# Altium PCB board.PcbDoc (part 3 of 3)
Units mil, origin at the board's own origin, x right, y up, seen from the top; angles counter-clockwise.
Board outline 2246 x 2100 mil, 2 copper layers (Top Layer, Bottom Layer); 47 components, 39 nets, 150 pads, 7 vias.
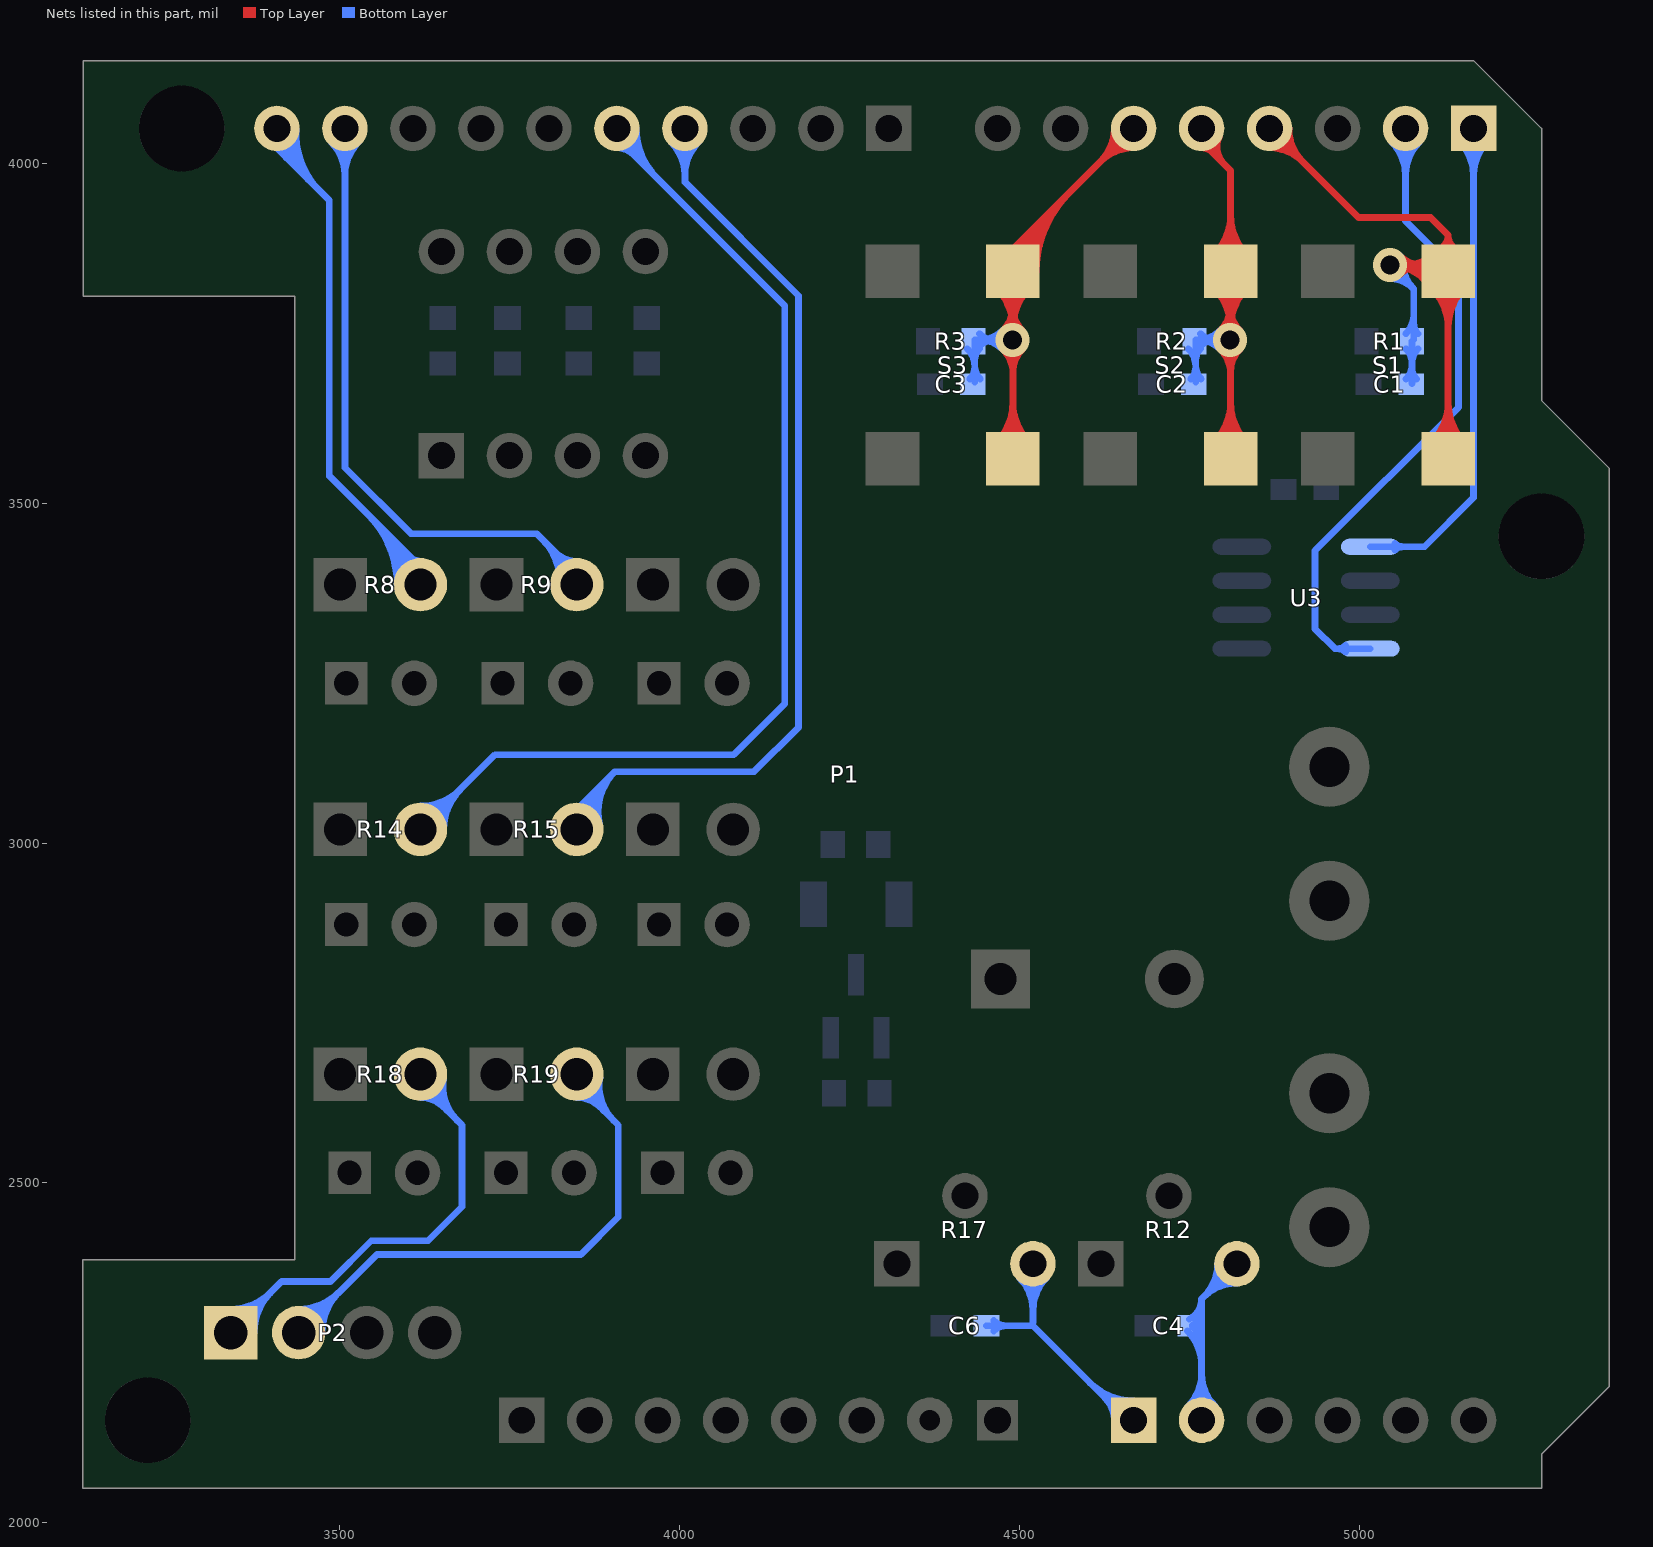
[diagram p3: the nets of this part, all layers, seen from the top]

## Via types
v1: diameter 50, hole 28, Top Layer to Bottom Layer, 7 vias

## Nets (pads, with @x,y where several pads share a name; then routed paths per layer and width w, separated by ;. In a path a pad name is that pad's centre, name@x,y a point inside that pad or via, vN(x,y) a via of type N, cw(c..) or ccw(c..) an arc to the next point about the centre after c; other vN are vias at no path point) (continued)
POTEN1: C6.2 P1.9 R17.3 | length 2419.6
  Bottom Layer w10: C6.2@4451.5,2290 4520,2290 4659,2151 P1.9@4668,2151 ; 4520,2295 R17.3@4520,2381.18 ; C6.2@4462.34,2282.4 cw(c4480.69,2264.05) 4480.69,2290 ; C6.2@4462.34,2282.4 cw(c4480.69,2264.05) 4480.69,2290 ; C6.2@4462.34,2282.4 cw(c4480.69,2264.05) 4480.69,2290 ; C6.2@4462.34,2282.4 cw(c4480.69,2264.05) 4480.69,2290 ; C6.2@4462.34,2282.4 cw(c4480.69,2264.05) 4480.69,2290 ; C6.2@4462.34,2297.6 ccw(c4480.69,2315.95) 4480.69,2290 ; C6.2@4462.34,2297.6 ccw(c4480.69,2315.95) 4480.69,2290 ; C6.2@4462.34,2297.6 ccw(c4480.69,2315.95) 4480.69,2290 ; C6.2@4462.34,2297.6 ccw(c4480.69,2315.95) 4480.69,2290 ; C6.2@4462.34,2297.6 ccw(c4480.69,2315.95) 4480.69,2290 ; R17.3@4499.87,2361.05 cw(c4451.28,2312.46) 4520,2312.46 ; R17.3@4499.87,2361.05 cw(c4451.28,2312.46) 4520,2312.46 ; R17.3@4499.87,2361.05 cw(c4451.28,2312.46) 4520,2312.46 ; R17.3@4499.87,2361.05 cw(c4451.28,2312.46) 4520,2312.46 ; R17.3@4499.87,2361.05 cw(c4451.28,2312.46) 4520,2312.46 ; R17.3@4506.94,2368.12 cw(c4475.42,2336.6) 4520,2336.6 ; R17.3@4506.94,2368.12 cw(c4475.42,2336.6) 4520,2336.6 ; R17.3@4506.94,2368.12 cw(c4475.42,2336.6) 4520,2336.6 ; R17.3@4506.94,2368.12 cw(c4475.42,2336.6) 4520,2336.6 ; R17.3@4506.94,2368.12 cw(c4475.42,2336.6) 4520,2336.6 ; 4520,2312.46 cw(c4588.72,2312.46) R17.3@4540.13,2361.05 ; 4520,2312.46 cw(c4588.72,2312.46) R17.3@4540.13,2361.05 ; 4520,2312.46 cw(c4588.72,2312.46) R17.3@4540.13,2361.05 ; 4520,2312.46 cw(c4588.72,2312.46) R17.3@4540.13,2361.05 ; 4520,2312.46 cw(c4588.72,2312.46) R17.3@4540.13,2361.05 ; 4520,2336.6 cw(c4564.58,2336.6) R17.3@4533.06,2368.12 ; 4520,2336.6 cw(c4564.58,2336.6) R17.3@4533.06,2368.12 ; 4520,2336.6 cw(c4564.58,2336.6) R17.3@4533.06,2368.12 ; 4520,2336.6 cw(c4564.58,2336.6) R17.3@4533.06,2368.12 ; 4520,2336.6 cw(c4564.58,2336.6) R17.3@4533.06,2368.12 ; 4604.04,2205.96 ccw(c4668,2269.91) P1.9@4668,2179.46 ; 4604.04,2205.96 ccw(c4668,2269.91) P1.9@4668,2179.46 ; 4604.04,2205.96 ccw(c4668,2269.91) P1.9@4668,2179.46 ; 4604.04,2205.96 ccw(c4668,2269.91) P1.9@4668,2179.46 ; 4604.04,2205.96 ccw(c4668,2269.91) P1.9@4668,2179.46 ; 4621.12,2188.88 ccw(c4668,2235.77) P1.9@4668,2169.46 ; 4621.12,2188.88 ccw(c4668,2235.77) P1.9@4668,2169.46 ; 4621.12,2188.88 ccw(c4668,2235.77) P1.9@4668,2169.46 ; 4621.12,2188.88 ccw(c4668,2235.77) P1.9@4668,2169.46 ; 4621.12,2188.88 ccw(c4668,2235.77) P1.9@4668,2169.46 ; 4625.77,2184.23 cw(c4592.54,2151) P1.9@4639.54,2151 ; 4625.77,2184.23 cw(c4592.54,2151) P1.9@4639.54,2151 ; 4625.77,2184.23 cw(c4592.54,2151) P1.9@4639.54,2151 ; 4625.77,2184.23 cw(c4592.54,2151) P1.9@4639.54,2151 ; 4625.77,2184.23 cw(c4592.54,2151) P1.9@4639.54,2151 ; P1.9@4638.19,2171.81 ccw(c4668,2201.63) P1.9@4668,2159.46 ; P1.9@4638.19,2171.81 ccw(c4668,2201.63) P1.9@4668,2159.46 ; P1.9@4638.19,2171.81 ccw(c4668,2201.63) P1.9@4668,2159.46 ; P1.9@4638.19,2171.81 ccw(c4668,2201.63) P1.9@4668,2159.46 ; P1.9@4638.19,2171.81 ccw(c4668,2201.63) P1.9@4668,2159.46
POTEN2: C4.2 P1.10 R12.3 | length 2905.4
  Bottom Layer w10: P1.10@4768,2151 4768,2329.18 ; R12.3@4820,2381.18 4768,2329.18 ; C4.2@4747.14,2282.4 cw(c4696.79,2232.05) 4768,2232.05 ; C4.2@4747.14,2282.4 cw(c4696.79,2232.05) 4768,2232.05 ; C4.2@4747.14,2282.4 cw(c4696.79,2232.05) 4768,2232.05 ; C4.2@4747.14,2282.4 cw(c4696.79,2232.05) 4768,2232.05 ; C4.2@4747.14,2282.4 cw(c4696.79,2232.05) 4768,2232.05 ; P1.10@4747.87,2171.13 ccw(c4699.28,2219.72) 4768,2219.72 ; P1.10@4747.87,2171.13 ccw(c4699.28,2219.72) 4768,2219.72 ; P1.10@4747.87,2171.13 ccw(c4699.28,2219.72) 4768,2219.72 ; P1.10@4747.87,2171.13 ccw(c4699.28,2219.72) 4768,2219.72 ; P1.10@4747.87,2171.13 ccw(c4699.28,2219.72) 4768,2219.72 ; C4.2@4749.86,2299.58 ccw(c4734.77,2329.18) 4768,2329.18 ; C4.2@4749.86,2299.58 ccw(c4734.77,2329.18) 4768,2329.18 ; C4.2@4749.86,2299.58 ccw(c4734.77,2329.18) 4768,2329.18 ; C4.2@4749.86,2299.58 ccw(c4734.77,2329.18) 4768,2329.18 ; C4.2@4749.86,2299.58 ccw(c4734.77,2329.18) 4768,2329.18 ; C4.2@4754.22,2289.47 cw(c4720.94,2256.19) 4768,2256.19 ; C4.2@4754.22,2289.47 cw(c4720.94,2256.19) 4768,2256.19 ; C4.2@4754.22,2289.47 cw(c4720.94,2256.19) 4768,2256.19 ; C4.2@4754.22,2289.47 cw(c4720.94,2256.19) 4768,2256.19 ; C4.2@4754.22,2289.47 cw(c4720.94,2256.19) 4768,2256.19 ; C4.2@4754.4,2290.67 ccw(c4743.09,2312.86) 4768,2312.86 ; C4.2@4754.4,2290.67 ccw(c4743.09,2312.86) 4768,2312.86 ; C4.2@4754.4,2290.67 ccw(c4743.09,2312.86) 4768,2312.86 ; C4.2@4754.4,2290.67 ccw(c4743.09,2312.86) 4768,2312.86 ; C4.2@4754.4,2290.67 ccw(c4743.09,2312.86) 4768,2312.86 ; P1.10@4754.94,2164.06 ccw(c4723.42,2195.58) 4768,2195.58 ; P1.10@4754.94,2164.06 ccw(c4723.42,2195.58) 4768,2195.58 ; P1.10@4754.94,2164.06 ccw(c4723.42,2195.58) 4768,2195.58 ; P1.10@4754.94,2164.06 ccw(c4723.42,2195.58) 4768,2195.58 ; P1.10@4754.94,2164.06 ccw(c4723.42,2195.58) 4768,2195.58 ; C4.2@4761.29,2296.54 cw(c4745.08,2280.33) C4.2@4768,2280.33 ; C4.2@4761.29,2296.54 cw(c4745.08,2280.33) C4.2@4768,2280.33 ; C4.2@4761.29,2296.54 cw(c4745.08,2280.33) C4.2@4768,2280.33 ; C4.2@4761.29,2296.54 cw(c4745.08,2280.33) C4.2@4768,2280.33 ; C4.2@4761.29,2296.54 cw(c4745.08,2280.33) C4.2@4768,2280.33 ; 4768,2195.58 ccw(c4812.58,2195.58) P1.10@4781.06,2164.06 ; 4768,2195.58 ccw(c4812.58,2195.58) P1.10@4781.06,2164.06 ; 4768,2195.58 ccw(c4812.58,2195.58) P1.10@4781.06,2164.06 ; 4768,2195.58 ccw(c4812.58,2195.58) P1.10@4781.06,2164.06 ; 4768,2195.58 ccw(c4812.58,2195.58) P1.10@4781.06,2164.06 ; 4768,2219.72 ccw(c4836.72,2219.72) P1.10@4788.13,2171.13 ; 4768,2219.72 ccw(c4836.72,2219.72) P1.10@4788.13,2171.13 ; 4768,2219.72 ccw(c4836.72,2219.72) P1.10@4788.13,2171.13 ; 4768,2219.72 ccw(c4836.72,2219.72) P1.10@4788.13,2171.13 ; 4768,2219.72 ccw(c4836.72,2219.72) P1.10@4788.13,2171.13 ; 4771.41,2332.59 cw(c4820,2284) R12.3@4820,2352.72 ; 4771.41,2332.59 ccw(c4722.82,2381.18) R12.3@4791.54,2381.18 ; 4771.41,2332.59 cw(c4820,2284) R12.3@4820,2352.72 ; 4771.41,2332.59 ccw(c4722.82,2381.18) R12.3@4791.54,2381.18 ; 4771.41,2332.59 ccw(c4722.82,2381.18) R12.3@4791.54,2381.18 ; 4771.41,2332.59 cw(c4820,2284) R12.3@4820,2352.72 ; 4771.41,2332.59 ccw(c4722.82,2381.18) R12.3@4791.54,2381.18 ; 4771.41,2332.59 cw(c4820,2284) R12.3@4820,2352.72 ; 4771.41,2332.59 ccw(c4722.82,2381.18) R12.3@4791.54,2381.18 ; 4771.41,2332.59 cw(c4820,2284) R12.3@4820,2352.72 ; 4788.48,2349.66 cw(c4820,2318.14) R12.3@4820,2362.72 ; 4788.48,2349.66 ccw(c4756.96,2381.18) R12.3@4801.54,2381.18 ; 4788.48,2349.66 cw(c4820,2318.14) R12.3@4820,2362.72 ; 4788.48,2349.66 ccw(c4756.96,2381.18) R12.3@4801.54,2381.18 ; 4788.48,2349.66 ccw(c4756.96,2381.18) R12.3@4801.54,2381.18 ; 4788.48,2349.66 cw(c4820,2318.14) R12.3@4820,2362.72 ; 4788.48,2349.66 ccw(c4756.96,2381.18) R12.3@4801.54,2381.18 ; 4788.48,2349.66 cw(c4820,2318.14) R12.3@4820,2362.72 ; 4788.48,2349.66 ccw(c4756.96,2381.18) R12.3@4801.54,2381.18 ; 4788.48,2349.66 cw(c4820,2318.14) R12.3@4820,2362.72
RED1: P1.32 R8.2 | length 4035.9
  Bottom Layer w10: P1.32@3408,4051 3408,4022 3485,3945 3485,3540 3619.06,3405.94 R8.2@3619.06,3380 ; P1.32@3406.47,4051.09 ccw(c3464.28,4047.63) 3423.33,4006.67 ; P1.32@3406.47,4051.09 ccw(c3464.28,4047.63) 3423.33,4006.67 ; P1.32@3406.47,4051.09 ccw(c3464.28,4047.63) 3423.33,4006.67 ; P1.32@3406.47,4051.09 ccw(c3464.28,4047.63) 3423.33,4006.67 ; P1.32@3406.47,4051.09 ccw(c3464.28,4047.63) 3423.33,4006.67 ; P1.32@3416.45,4050.49 ccw(c3493.95,4045.85) 3439.05,3990.95 ; P1.32@3416.45,4050.49 ccw(c3493.95,4045.85) 3439.05,3990.95 ; P1.32@3416.45,4050.49 ccw(c3493.95,4045.85) 3439.05,3990.95 ; P1.32@3416.45,4050.49 ccw(c3493.95,4045.85) 3439.05,3990.95 ; P1.32@3416.45,4050.49 ccw(c3493.95,4045.85) 3439.05,3990.95 ; P1.32@3426.43,4049.9 ccw(c3523.62,4044.07) 3454.77,3975.23 ; P1.32@3426.43,4049.9 ccw(c3523.62,4044.07) 3454.77,3975.23 ; P1.32@3426.43,4049.9 ccw(c3523.62,4044.07) 3454.77,3975.23 ; P1.32@3426.43,4049.9 ccw(c3523.62,4044.07) 3454.77,3975.23 ; P1.32@3426.43,4049.9 ccw(c3523.62,4044.07) 3454.77,3975.23 ; P1.32@3436.41,4049.3 ccw(c3553.28,4042.29) 3470.5,3959.5 ; P1.32@3436.41,4049.3 ccw(c3553.28,4042.29) 3470.5,3959.5 ; P1.32@3436.41,4049.3 ccw(c3553.28,4042.29) 3470.5,3959.5 ; P1.32@3436.41,4049.3 ccw(c3553.28,4042.29) 3470.5,3959.5 ; P1.32@3436.41,4049.3 ccw(c3553.28,4042.29) 3470.5,3959.5 ; 3542.04,3482.96 cw(c3439.07,3380) R8.2@3584.68,3380 ; 3542.04,3482.96 cw(c3439.07,3380) R8.2@3584.68,3380 ; 3542.04,3482.96 cw(c3439.07,3380) R8.2@3584.68,3380 ; 3542.04,3482.96 cw(c3439.07,3380) R8.2@3584.68,3380 ; 3542.04,3482.96 cw(c3439.07,3380) R8.2@3584.68,3380 ; 3559.11,3465.89 cw(c3473.21,3380) R8.2@3594.68,3380 ; 3559.11,3465.89 cw(c3473.21,3380) R8.2@3594.68,3380 ; 3559.11,3465.89 cw(c3473.21,3380) R8.2@3594.68,3380 ; 3559.11,3465.89 cw(c3473.21,3380) R8.2@3594.68,3380 ; 3559.11,3465.89 cw(c3473.21,3380) R8.2@3594.68,3380 ; 3576.18,3448.82 cw(c3507.36,3380) R8.2@3604.69,3380 ; 3576.18,3448.82 cw(c3507.36,3380) R8.2@3604.69,3380 ; 3576.18,3448.82 cw(c3507.36,3380) R8.2@3604.69,3380 ; 3576.18,3448.82 cw(c3507.36,3380) R8.2@3604.69,3380 ; 3576.18,3448.82 cw(c3507.36,3380) R8.2@3604.69,3380 ; 3593.25,3431.75 cw(c3541.5,3380) R8.2@3614.68,3380 ; 3593.25,3431.75 cw(c3541.5,3380) R8.2@3614.68,3380 ; 3593.25,3431.75 cw(c3541.5,3380) R8.2@3614.68,3380 ; 3593.25,3431.75 cw(c3541.5,3380) R8.2@3614.68,3380 ; 3593.25,3431.75 cw(c3541.5,3380) R8.2@3614.68,3380 ; 3604.67,3420.33 ccw(c3619.06,3434.71) R8.2@3619.06,3414.37 ; 3604.67,3420.33 ccw(c3619.06,3434.71) R8.2@3619.06,3414.37 ; 3604.67,3420.33 ccw(c3619.06,3434.71) R8.2@3619.06,3414.37 ; 3604.67,3420.33 ccw(c3619.06,3434.71) R8.2@3619.06,3414.37 ; 3604.67,3420.33 ccw(c3619.06,3434.71) R8.2@3619.06,3414.37
RED2: P1.27 R14.2 | length 3735.1
  Bottom Layer w10: R14.2@3619.06,3020 3729.06,3130 4080,3130 4155,3205 4155,3790 3908,4037 P1.27@3908,4051 ; R14.2@3619.06,3044.37 ccw(c3619.06,3103.2) 3660.66,3061.6 ; R14.2@3619.06,3044.37 ccw(c3619.06,3103.2) 3660.66,3061.6 ; R14.2@3619.06,3044.37 ccw(c3619.06,3103.2) 3660.66,3061.6 ; R14.2@3619.06,3044.37 ccw(c3619.06,3103.2) 3660.66,3061.6 ; R14.2@3619.06,3044.37 ccw(c3619.06,3103.2) 3660.66,3061.6 ; R14.2@3619.06,3054.37 ccw(c3619.06,3137.35) 3677.73,3078.67 ; R14.2@3619.06,3054.37 ccw(c3619.06,3137.35) 3677.73,3078.67 ; R14.2@3619.06,3054.37 ccw(c3619.06,3137.35) 3677.73,3078.67 ; R14.2@3619.06,3054.37 ccw(c3619.06,3137.35) 3677.73,3078.67 ; R14.2@3619.06,3054.37 ccw(c3619.06,3137.35) 3677.73,3078.67 ; R14.2@3643.43,3020 cw(c3702.26,3020) 3660.66,3061.6 ; R14.2@3643.43,3020 cw(c3702.26,3020) 3660.66,3061.6 ; R14.2@3643.43,3020 cw(c3702.26,3020) 3660.66,3061.6 ; R14.2@3643.43,3020 cw(c3702.26,3020) 3660.66,3061.6 ; R14.2@3643.43,3020 cw(c3702.26,3020) 3660.66,3061.6 ; R14.2@3653.43,3020 cw(c3736.4,3020) 3677.73,3078.67 ; R14.2@3653.43,3020 cw(c3736.4,3020) 3677.73,3078.67 ; R14.2@3653.43,3020 cw(c3736.4,3020) 3677.73,3078.67 ; R14.2@3653.43,3020 cw(c3736.4,3020) 3677.73,3078.67 ; R14.2@3653.43,3020 cw(c3736.4,3020) 3677.73,3078.67 ; P1.27@3908,4022.54 cw(c3908,3987.62) 3932.69,4012.31 ; P1.27@3908,4022.54 cw(c3908,3987.62) 3932.69,4012.31 ; P1.27@3908,4022.54 cw(c3908,3987.62) 3932.69,4012.31 ; P1.27@3908,4022.54 cw(c3908,3987.62) 3932.69,4012.31 ; P1.27@3908,4022.54 cw(c3908,3987.62) 3932.69,4012.31 ; P1.27@3916.46,4051 ccw(c3970.7,4051) 3932.35,4012.65 ; P1.27@3916.46,4051 ccw(c3970.7,4051) 3932.35,4012.65 ; P1.27@3916.46,4051 ccw(c3970.7,4051) 3932.35,4012.65 ; P1.27@3916.46,4051 ccw(c3970.7,4051) 3932.35,4012.65 ; P1.27@3916.46,4051 ccw(c3970.7,4051) 3932.35,4012.65 ; P1.27@3926.46,4051 ccw(c4004.84,4051) 3949.42,3995.58 ; P1.27@3926.46,4051 ccw(c4004.84,4051) 3949.42,3995.58 ; P1.27@3926.46,4051 ccw(c4004.84,4051) 3949.42,3995.58 ; P1.27@3926.46,4051 ccw(c4004.84,4051) 3949.42,3995.58 ; P1.27@3926.46,4051 ccw(c4004.84,4051) 3949.42,3995.58 ; P1.27@3936.46,4051 ccw(c4038.98,4051) 3966.49,3978.51 ; P1.27@3936.46,4051 ccw(c4038.98,4051) 3966.49,3978.51 ; P1.27@3936.46,4051 ccw(c4038.98,4051) 3966.49,3978.51 ; P1.27@3936.46,4051 ccw(c4038.98,4051) 3966.49,3978.51 ; P1.27@3936.46,4051 ccw(c4038.98,4051) 3966.49,3978.51
RED3: P2.1 R18.2 | length 2765.1
  Bottom Layer w10: P2.1@3340,2280 3415,2355 3486.72,2355 3546.72,2415 3630,2415 3680,2465 3680,2585 3619.06,2645.94 R18.2@3619.06,2660 ; P2.1@3340,2304.37 ccw(c3340,2363.2) 3381.6,2321.6 ; P2.1@3340,2304.37 ccw(c3340,2363.2) 3381.6,2321.6 ; P2.1@3340,2304.37 ccw(c3340,2363.2) 3381.6,2321.6 ; P2.1@3340,2304.37 ccw(c3340,2363.2) 3381.6,2321.6 ; P2.1@3340,2304.37 ccw(c3340,2363.2) 3381.6,2321.6 ; P2.1@3340,2314.37 ccw(c3340,2397.35) 3398.67,2338.67 ; P2.1@3340,2314.37 ccw(c3340,2397.35) 3398.67,2338.67 ; P2.1@3340,2314.37 ccw(c3340,2397.35) 3398.67,2338.67 ; P2.1@3340,2314.37 ccw(c3340,2397.35) 3398.67,2338.67 ; P2.1@3340,2314.37 ccw(c3340,2397.35) 3398.67,2338.67 ; P2.1@3364.37,2280 cw(c3423.2,2280) 3381.6,2321.6 ; P2.1@3364.37,2280 cw(c3423.2,2280) 3381.6,2321.6 ; P2.1@3364.37,2280 cw(c3423.2,2280) 3381.6,2321.6 ; P2.1@3364.37,2280 cw(c3423.2,2280) 3381.6,2321.6 ; P2.1@3364.37,2280 cw(c3423.2,2280) 3381.6,2321.6 ; P2.1@3374.37,2280 cw(c3457.35,2280) 3398.67,2338.67 ; P2.1@3374.37,2280 cw(c3457.35,2280) 3398.67,2338.67 ; P2.1@3374.37,2280 cw(c3457.35,2280) 3398.67,2338.67 ; P2.1@3374.37,2280 cw(c3457.35,2280) 3398.67,2338.67 ; P2.1@3374.37,2280 cw(c3457.35,2280) 3398.67,2338.67 ; R18.2@3619.06,2625.63 cw(c3619.06,2576.59) 3653.73,2611.27 ; R18.2@3619.06,2625.63 cw(c3619.06,2576.59) 3653.73,2611.27 ; R18.2@3619.06,2625.63 cw(c3619.06,2576.59) 3653.73,2611.27 ; R18.2@3619.06,2625.63 cw(c3619.06,2576.59) 3653.73,2611.27 ; R18.2@3619.06,2625.63 cw(c3619.06,2576.59) 3653.73,2611.27 ; R18.2@3633.23,2657.65 ccw(c3676.41,2650.49) 3645.46,2619.54 ; R18.2@3633.23,2657.65 ccw(c3676.41,2650.49) 3645.46,2619.54 ; R18.2@3633.23,2657.65 ccw(c3676.41,2650.49) 3645.46,2619.54 ; R18.2@3633.23,2657.65 ccw(c3676.41,2650.49) 3645.46,2619.54 ; R18.2@3633.23,2657.65 ccw(c3676.41,2650.49) 3645.46,2619.54 ; R18.2@3643.1,2656.01 ccw(c3700.01,2646.58) 3659.22,2605.78 ; R18.2@3643.1,2656.01 ccw(c3700.01,2646.58) 3659.22,2605.78 ; R18.2@3643.1,2656.01 ccw(c3700.01,2646.58) 3659.22,2605.78 ; R18.2@3643.1,2656.01 ccw(c3700.01,2646.58) 3659.22,2605.78 ; R18.2@3643.1,2656.01 ccw(c3700.01,2646.58) 3659.22,2605.78 ; R18.2@3652.96,2654.38 ccw(c3723.6,2642.66) 3672.97,2592.03 ; R18.2@3652.96,2654.38 ccw(c3723.6,2642.66) 3672.97,2592.03 ; R18.2@3652.96,2654.38 ccw(c3723.6,2642.66) 3672.97,2592.03 ; R18.2@3652.96,2654.38 ccw(c3723.6,2642.66) 3672.97,2592.03 ; R18.2@3652.96,2654.38 ccw(c3723.6,2642.66) 3672.97,2592.03
RX_485: P1.16 U3.4 | length 1967.8
  Bottom Layer w10: U3.4@5016.19,3285.81 4964.19,3285.81 4935,3315 4935,3430 5145.86,3640.86 5145.86,3837.14 5068,3915 P1.16@5068,4051 ; 4968.25,3285.81 cw(c4968.25,3269.37) U3.4@4979.88,3281 ; 4968.25,3285.81 ccw(c4968.25,3302.26) U3.4@4979.88,3290.63 ; 4968.25,3285.81 cw(c4968.25,3269.37) U3.4@4979.88,3281 ; 4968.25,3285.81 ccw(c4968.25,3302.26) U3.4@4979.88,3290.63 ; 4968.25,3285.81 ccw(c4968.25,3302.26) U3.4@4979.88,3290.63 ; 4968.25,3285.81 cw(c4968.25,3269.37) U3.4@4979.88,3281 ; 4968.25,3285.81 ccw(c4968.25,3302.26) U3.4@4979.88,3290.63 ; 4968.25,3285.81 cw(c4968.25,3269.37) U3.4@4979.88,3281 ; 4968.25,3285.81 ccw(c4968.25,3302.26) U3.4@4979.88,3290.63 ; 4968.25,3285.81 cw(c4968.25,3269.37) U3.4@4979.88,3281 ; P1.16@5047.87,4030.87 cw(c4999.28,3982.28) 5068,3982.28 ; P1.16@5047.87,4030.87 cw(c4999.28,3982.28) 5068,3982.28 ; P1.16@5047.87,4030.87 cw(c4999.28,3982.28) 5068,3982.28 ; P1.16@5047.87,4030.87 cw(c4999.28,3982.28) 5068,3982.28 ; P1.16@5047.87,4030.87 cw(c4999.28,3982.28) 5068,3982.28 ; P1.16@5054.94,4037.94 cw(c5023.42,4006.42) 5068,4006.42 ; P1.16@5054.94,4037.94 cw(c5023.42,4006.42) 5068,4006.42 ; P1.16@5054.94,4037.94 cw(c5023.42,4006.42) 5068,4006.42 ; P1.16@5054.94,4037.94 cw(c5023.42,4006.42) 5068,4006.42 ; P1.16@5054.94,4037.94 cw(c5023.42,4006.42) 5068,4006.42 ; 5068,3982.28 cw(c5136.72,3982.28) P1.16@5088.13,4030.87 ; 5068,3982.28 cw(c5136.72,3982.28) P1.16@5088.13,4030.87 ; 5068,3982.28 cw(c5136.72,3982.28) P1.16@5088.13,4030.87 ; 5068,3982.28 cw(c5136.72,3982.28) P1.16@5088.13,4030.87 ; 5068,3982.28 cw(c5136.72,3982.28) P1.16@5088.13,4030.87 ; 5068,4006.42 cw(c5112.58,4006.42) P1.16@5081.06,4037.94 ; 5068,4006.42 cw(c5112.58,4006.42) P1.16@5081.06,4037.94 ; 5068,4006.42 cw(c5112.58,4006.42) P1.16@5081.06,4037.94 ; 5068,4006.42 cw(c5112.58,4006.42) P1.16@5081.06,4037.94 ; 5068,4006.42 cw(c5112.58,4006.42) P1.16@5081.06,4037.94
SW1: C1.2 P1.18 R1.2 S1.3 S1.4 | length 2234.8
  Top Layer w10: P1.18@4868,4022.54 cw(c4868,3953.82) 4916.59,4002.41 cw(c4965.18,4051) P1.18@4896.46,4051 ; P1.18@4868,4032.54 cw(c4868,3987.96) 4899.52,4019.48 cw(c4931.04,4051) P1.18@4886.46,4051 ; P1.18@4868,4051 4999,3920 5105,3920 5130.58,3894.42 ; v1@5059.14,3835.86 cw(c5093.28,3801.72) 5093.28,3850 cw(c5093.28,3898.28) v1@5059.14,3864.14 ; v1@5064.64,3850 cw(c5064.64,3792.83) S1.4@5110.87,3826.46 ; v1@5069.83,3850 ccw(c5069.83,3901.55) S1.4@5106.28,3865.1 ; 5084.28,3850 cw(c5084.28,3807.12) S1.4@5118.96,3832.34 ; S1.4@5102.79,3820.58 ccw(c5045,3778.55) v1(5045,3850) S1.4@5121.38,3850 ; S1.3@5106.28,3589.51 ccw(c5047.61,3648.18) 5130.58,3648.18 ccw(c5213.56,3648.18) S1.3@5154.89,3589.51 ; S1.4@5106.28,3816.49 cw(c5047.61,3757.82) 5130.58,3757.82 cw(c5213.56,3757.82) S1.4@5154.89,3816.49 ; S1.3@5113.35,3582.44 ccw(c5071.75,3624.04) 5130.58,3624.04 ccw(c5189.42,3624.04) S1.3@5147.81,3582.44 ; S1.4@5113.35,3823.56 cw(c5071.75,3781.96) 5130.58,3781.96 cw(c5189.42,3781.96) S1.4@5147.81,3823.56 ; S1.3@5130.58,3565.2 S1.4@5130.58,3840.8 5130.58,3894.42 ; 5130.58,3894.42 cw(c5105.94,3894.42) 5116.23,3872.03 ccw(c5105.94,3894.42) 5130.58,3894.42 ; 5130.58,3894.42 ccw(c5155.22,3894.42) 5144.93,3872.03 cw(c5155.22,3894.42) 5130.58,3894.42
  Bottom Layer w10: v1@5045,3830 cw(c5045,3781.72) 5079.14,3815.86 cw(c5113.28,3850) v1@5065,3850 ; v1(5045,3850) 5080,3815 R1.2@5080,3740.54 ; R1.2@5068.47,3748.96 ccw(c5040.64,3776.79) 5080,3776.79 ; C1.2@5077.46,3675.97 R1.2@5077.46,3738 ; 5080,3764.55 ccw(c5102.04,3764.55) R1.2@5086.46,3748.96 ; 5077.46,3705.33 cw(c5108.16,3705.33) 5086.46,3727.04 ccw(c5108.16,3705.33) 5077.46,3705.33 ; 5077.46,3705.33 ccw(c5046.76,3705.33) 5068.47,3727.04 cw(c5046.76,3705.33) 5077.46,3705.33 ; C1.2@5068.9,3682.6 ccw(c5048.21,3703.28) 5077.46,3703.28 cw(c5048.21,3703.28) C1.2@5068.9,3682.6 ; 5077.46,3698.61 ccw(c5100.11,3698.61) 5084.1,3682.6 cw(c5100.11,3698.61) 5077.46,3698.61
SW2: C2.2 P1.19 R2.2 S2.3 S2.4 | length 6631
  Top Layer w10: P1.19@4768,4051 4768,4032 4810.58,3989.42 S2.4@4810.58,3840.8 S2.3@4810.58,3565.2 ; P1.19@4768,4022.54 cw(c4768,3999.69) 4784.16,4015.84 ; P1.19@4768,4022.54 cw(c4768,3999.69) 4784.16,4015.84 ; P1.19@4768,4022.54 cw(c4768,3999.69) 4784.16,4015.84 ; P1.19@4768,4022.54 cw(c4768,3999.69) 4784.16,4015.84 ; P1.19@4768,4022.54 cw(c4768,3999.69) 4784.16,4015.84 ; P1.19@4775.69,4047.47 ccw(c4798.51,4036.99) 4780.76,4019.24 ; P1.19@4775.69,4047.47 ccw(c4798.51,4036.99) 4780.76,4019.24 ; P1.19@4775.69,4047.47 ccw(c4798.51,4036.99) 4780.76,4019.24 ; P1.19@4775.69,4047.47 ccw(c4798.51,4036.99) 4780.76,4019.24 ; P1.19@4775.69,4047.47 ccw(c4798.51,4036.99) 4780.76,4019.24 ; P1.19@4784.78,4043.3 ccw(c4812.44,4030.6) 4790.92,4009.08 ; P1.19@4784.78,4043.3 ccw(c4812.44,4030.6) 4790.92,4009.08 ; P1.19@4784.78,4043.3 ccw(c4812.44,4030.6) 4790.92,4009.08 ; P1.19@4784.78,4043.3 ccw(c4812.44,4030.6) 4790.92,4009.08 ; P1.19@4784.78,4043.3 ccw(c4812.44,4030.6) 4790.92,4009.08 ; S2.3@4786.28,3589.51 ccw(c4727.61,3648.18) 4810.58,3648.18 ; S2.3@4786.28,3589.51 ccw(c4727.61,3648.18) 4810.58,3648.18 ; S2.3@4786.28,3589.51 ccw(c4727.61,3648.18) 4810.58,3648.18 ; S2.3@4786.28,3589.51 ccw(c4727.61,3648.18) 4810.58,3648.18 ; S2.3@4786.28,3589.51 ccw(c4727.61,3648.18) 4810.58,3648.18 ; S2.4@4786.28,3816.49 cw(c4727.61,3757.82) v1@4810.58,3757.82 ; S2.4@4786.28,3816.49 cw(c4727.61,3757.82) v1@4810.58,3757.82 ; S2.4@4786.28,3816.49 cw(c4727.61,3757.82) v1@4810.58,3757.82 ; S2.4@4786.28,3816.49 cw(c4727.61,3757.82) v1@4810.58,3757.82 ; S2.4@4786.28,3816.49 cw(c4727.61,3757.82) v1@4810.58,3757.82 ; S2.4@4786.28,3865.1 ccw(c4727.61,3923.77) 4810.58,3923.77 ; S2.4@4786.28,3865.1 ccw(c4727.61,3923.77) 4810.58,3923.77 ; S2.4@4786.28,3865.1 ccw(c4727.61,3923.77) 4810.58,3923.77 ; S2.4@4786.28,3865.1 ccw(c4727.61,3923.77) 4810.58,3923.77 ; S2.4@4786.28,3865.1 ccw(c4727.61,3923.77) 4810.58,3923.77 ; S2.3@4793.35,3582.44 ccw(c4751.75,3624.04) 4810.58,3624.04 ; S2.3@4793.35,3582.44 ccw(c4751.75,3624.04) 4810.58,3624.04 ; S2.3@4793.35,3582.44 ccw(c4751.75,3624.04) 4810.58,3624.04 ; S2.3@4793.35,3582.44 ccw(c4751.75,3624.04) 4810.58,3624.04 ; S2.3@4793.35,3582.44 ccw(c4751.75,3624.04) 4810.58,3624.04 ; S2.4@4793.35,3823.56 cw(c4751.75,3781.96) 4810.58,3781.96 ; S2.4@4793.35,3823.56 cw(c4751.75,3781.96) 4810.58,3781.96 ; S2.4@4793.35,3823.56 cw(c4751.75,3781.96) 4810.58,3781.96 ; S2.4@4793.35,3823.56 cw(c4751.75,3781.96) 4810.58,3781.96 ; S2.4@4793.35,3823.56 cw(c4751.75,3781.96) 4810.58,3781.96 ; S2.4@4793.35,3858.03 ccw(c4751.75,3899.63) 4810.58,3899.63 ; S2.4@4793.35,3858.03 ccw(c4751.75,3899.63) 4810.58,3899.63 ; S2.4@4793.35,3858.03 ccw(c4751.75,3899.63) 4810.58,3899.63 ; S2.4@4793.35,3858.03 ccw(c4751.75,3899.63) 4810.58,3899.63 ; S2.4@4793.35,3858.03 ccw(c4751.75,3899.63) 4810.58,3899.63 ; P1.19@4793.87,4039.12 ccw(c4826.37,4024.2) 4801.08,3998.92 ; P1.19@4793.87,4039.12 ccw(c4826.37,4024.2) 4801.08,3998.92 ; P1.19@4793.87,4039.12 ccw(c4826.37,4024.2) 4801.08,3998.92 ; P1.19@4793.87,4039.12 ccw(c4826.37,4024.2) 4801.08,3998.92 ; P1.19@4793.87,4039.12 ccw(c4826.37,4024.2) 4801.08,3998.92 ; v1@4795.86,3725.86 cw(c4760.31,3690.31) 4810.58,3690.31 ; v1@4795.86,3725.86 cw(c4760.31,3690.31) 4810.58,3690.31 ; v1@4795.86,3725.86 cw(c4760.31,3690.31) 4810.58,3690.31 ; v1@4795.86,3725.86 cw(c4760.31,3690.31) 4810.58,3690.31 ; v1@4795.86,3725.86 cw(c4760.31,3690.31) 4810.58,3690.31 ; v1@4795.86,3754.14 ccw(c4760.31,3789.69) 4810.58,3789.69 ; v1@4795.86,3754.14 ccw(c4760.31,3789.69) 4810.58,3789.69 ; v1@4795.86,3754.14 ccw(c4760.31,3789.69) 4810.58,3789.69 ; v1@4795.86,3754.14 ccw(c4760.31,3789.69) 4810.58,3789.69 ; v1@4795.86,3754.14 ccw(c4760.31,3789.69) 4810.58,3789.69 ; v1@4802.93,3732.93 cw(c4784.45,3714.45) 4810.58,3714.45 ; v1@4802.93,3732.93 cw(c4784.45,3714.45) 4810.58,3714.45 ; v1@4802.93,3732.93 cw(c4784.45,3714.45) 4810.58,3714.45 ; v1@4802.93,3732.93 cw(c4784.45,3714.45) 4810.58,3714.45 ; v1@4802.93,3732.93 cw(c4784.45,3714.45) 4810.58,3714.45 ; v1@4802.93,3747.07 ccw(c4784.45,3765.55) 4810.58,3765.55 ; v1@4802.93,3747.07 ccw(c4784.45,3765.55) 4810.58,3765.55 ; v1@4802.93,3747.07 ccw(c4784.45,3765.55) 4810.58,3765.55 ; v1@4802.93,3747.07 ccw(c4784.45,3765.55) 4810.58,3765.55 ; v1@4802.93,3747.07 ccw(c4784.45,3765.55) 4810.58,3765.55 ; 4810.58,3624.04 ccw(c4869.42,3624.04) S2.3@4827.81,3582.44 ; 4810.58,3624.04 ccw(c4869.42,3624.04) S2.3@4827.81,3582.44 ; 4810.58,3624.04 ccw(c4869.42,3624.04) S2.3@4827.81,3582.44 ; 4810.58,3624.04 ccw(c4869.42,3624.04) S2.3@4827.81,3582.44 ; 4810.58,3624.04 ccw(c4869.42,3624.04) S2.3@4827.81,3582.44 ; 4810.58,3648.18 ccw(c4893.56,3648.18) S2.3@4834.89,3589.51 ; 4810.58,3648.18 ccw(c4893.56,3648.18) S2.3@4834.89,3589.51 ; 4810.58,3648.18 ccw(c4893.56,3648.18) S2.3@4834.89,3589.51 ; 4810.58,3648.18 ccw(c4893.56,3648.18) S2.3@4834.89,3589.51 ; 4810.58,3648.18 ccw(c4893.56,3648.18) S2.3@4834.89,3589.51 ; 4810.58,3693.12 cw(c4856.88,3693.12) v1@4824.14,3725.86 ; 4810.58,3693.12 cw(c4856.88,3693.12) v1@4824.14,3725.86 ; 4810.58,3693.12 cw(c4856.88,3693.12) v1@4824.14,3725.86 ; 4810.58,3693.12 cw(c4856.88,3693.12) v1@4824.14,3725.86 ; 4810.58,3693.12 cw(c4856.88,3693.12) v1@4824.14,3725.86 ; v1@4810.58,3757.82 cw(c4893.56,3757.82) S2.4@4834.89,3816.49 ; v1@4810.58,3757.82 cw(c4893.56,3757.82) S2.4@4834.89,3816.49 ; v1@4810.58,3757.82 cw(c4893.56,3757.82) S2.4@4834.89,3816.49 ; v1@4810.58,3757.82 cw(c4893.56,3757.82) S2.4@4834.89,3816.49 ; v1@4810.58,3757.82 cw(c4893.56,3757.82) S2.4@4834.89,3816.49 ; 4810.58,3781.96 cw(c4869.42,3781.96) S2.4@4827.81,3823.56 ; 4810.58,3781.96 cw(c4869.42,3781.96) S2.4@4827.81,3823.56 ; 4810.58,3781.96 cw(c4869.42,3781.96) S2.4@4827.81,3823.56 ; 4810.58,3781.96 cw(c4869.42,3781.96) S2.4@4827.81,3823.56 ; 4810.58,3781.96 cw(c4869.42,3781.96) S2.4@4827.81,3823.56 ; 4810.58,3786.88 ccw(c4856.88,3786.88) v1@4824.14,3754.14 ; 4810.58,3786.88 ccw(c4856.88,3786.88) v1@4824.14,3754.14 ; 4810.58,3786.88 ccw(c4856.88,3786.88) v1@4824.14,3754.14 ; 4810.58,3786.88 ccw(c4856.88,3786.88) v1@4824.14,3754.14 ; 4810.58,3786.88 ccw(c4856.88,3786.88) v1@4824.14,3754.14 ; 4810.58,3899.63 ccw(c4869.42,3899.63) S2.4@4827.81,3858.03 ; 4810.58,3899.63 ccw(c4869.42,3899.63) S2.4@4827.81,3858.03 ; 4810.58,3899.63 ccw(c4869.42,3899.63) S2.4@4827.81,3858.03 ; 4810.58,3899.63 ccw(c4869.42,3899.63) S2.4@4827.81,3858.03 ; 4810.58,3899.63 ccw(c4869.42,3899.63) S2.4@4827.81,3858.03 ; 4810.58,3923.77 ccw(c4893.56,3923.77) S2.4@4834.89,3865.1 ; 4810.58,3923.77 ccw(c4893.56,3923.77) S2.4@4834.89,3865.1 ; 4810.58,3923.77 ccw(c4893.56,3923.77) S2.4@4834.89,3865.1 ; 4810.58,3923.77 ccw(c4893.56,3923.77) S2.4@4834.89,3865.1 ; 4810.58,3923.77 ccw(c4893.56,3923.77) S2.4@4834.89,3865.1
  Bottom Layer w10: C2.2@4759.46,3677.97 4759.46,3740 v1(4810,3740) ; R2.2@4748.47,3727.04 cw(c4721.94,3700.5) 4759.46,3700.5 ; R2.2@4748.47,3727.04 cw(c4721.94,3700.5) 4759.46,3700.5 ; R2.2@4748.47,3727.04 cw(c4721.94,3700.5) 4759.46,3700.5 ; R2.2@4748.47,3727.04 cw(c4721.94,3700.5) 4759.46,3700.5 ; R2.2@4748.47,3727.04 cw(c4721.94,3700.5) 4759.46,3700.5 ; C2.2@4752.14,3682.6 ccw(c4734.47,3700.27) 4759.46,3700.27 ; C2.2@4752.14,3682.6 ccw(c4734.47,3700.27) 4759.46,3700.27 ; C2.2@4752.14,3682.6 ccw(c4734.47,3700.27) 4759.46,3700.27 ; C2.2@4752.14,3682.6 ccw(c4734.47,3700.27) 4759.46,3700.27 ; C2.2@4752.14,3682.6 ccw(c4734.47,3700.27) 4759.46,3700.27 ; 4759.46,3701.62 ccw(c4786.37,3701.62) C2.2@4767.34,3682.6 ; 4759.46,3701.62 ccw(c4786.37,3701.62) C2.2@4767.34,3682.6 ; 4759.46,3701.62 ccw(c4786.37,3701.62) C2.2@4767.34,3682.6 ; 4759.46,3701.62 ccw(c4786.37,3701.62) C2.2@4767.34,3682.6 ; 4759.46,3701.62 ccw(c4786.37,3701.62) C2.2@4767.34,3682.6 ; 4759.46,3710.16 cw(c4783.34,3710.16) R2.2@4766.46,3727.04 ; 4759.46,3710.16 cw(c4783.34,3710.16) R2.2@4766.46,3727.04 ; 4759.46,3710.16 cw(c4783.34,3710.16) R2.2@4766.46,3727.04 ; 4759.46,3710.16 cw(c4783.34,3710.16) R2.2@4766.46,3727.04 ; 4759.46,3710.16 cw(c4783.34,3710.16) R2.2@4766.46,3727.04 ; R2.2@4761.72,3740 cw(c4761.72,3691.72) v1@4795.86,3725.86 ; R2.2@4761.72,3740 ccw(c4761.72,3788.28) v1@4795.86,3754.14 ; R2.2@4761.72,3740 cw(c4761.72,3691.72) v1@4795.86,3725.86 ; R2.2@4761.72,3740 ccw(c4761.72,3788.28) v1@4795.86,3754.14 ; R2.2@4761.72,3740 ccw(c4761.72,3788.28) v1@4795.86,3754.14 ; R2.2@4761.72,3740 cw(c4761.72,3691.72) v1@4795.86,3725.86 ; R2.2@4761.72,3740 ccw(c4761.72,3788.28) v1@4795.86,3754.14 ; R2.2@4761.72,3740 cw(c4761.72,3691.72) v1@4795.86,3725.86 ; R2.2@4761.72,3740 ccw(c4761.72,3788.28) v1@4795.86,3754.14 ; R2.2@4761.72,3740 cw(c4761.72,3691.72) v1@4795.86,3725.86 ; R2.2@4766.46,3730.98 cw(c4788.24,3709.19) v1@4788.24,3740 ; R2.2@4766.46,3730.98 cw(c4788.24,3709.19) v1@4788.24,3740 ; R2.2@4766.46,3730.98 cw(c4788.24,3709.19) v1@4788.24,3740 ; R2.2@4766.46,3730.98 cw(c4788.24,3709.19) v1@4788.24,3740 ; R2.2@4766.46,3730.98 cw(c4788.24,3709.19) v1@4788.24,3740 ; R2.2@4766.46,3748.96 ccw(c4788.09,3770.59) v1@4788.09,3740 ; R2.2@4766.46,3748.96 ccw(c4788.09,3770.59) v1@4788.09,3740 ; R2.2@4766.46,3748.96 ccw(c4788.09,3770.59) v1@4788.09,3740 ; R2.2@4766.46,3748.96 ccw(c4788.09,3770.59) v1@4788.09,3740 ; R2.2@4766.46,3748.96 ccw(c4788.09,3770.59) v1@4788.09,3740
SW3: C3.2 P1.20 R3.2 S3.3 S3.4 | length 8058.6
  Top Layer w10: S3.3@4490.58,3565.2 S3.4@4490.58,3840.8 4490.58,3873.58 P1.20@4668,4051 ; S3.3@4466.28,3589.51 ccw(c4407.61,3648.18) 4490.58,3648.18 ; S3.3@4466.28,3589.51 ccw(c4407.61,3648.18) 4490.58,3648.18 ; S3.3@4466.28,3589.51 ccw(c4407.61,3648.18) 4490.58,3648.18 ; S3.3@4466.28,3589.51 ccw(c4407.61,3648.18) 4490.58,3648.18 ; S3.3@4466.28,3589.51 ccw(c4407.61,3648.18) 4490.58,3648.18 ; S3.4@4466.28,3816.49 cw(c4407.61,3757.82) v1@4490.58,3757.82 ; S3.4@4466.28,3816.49 cw(c4407.61,3757.82) v1@4490.58,3757.82 ; S3.4@4466.28,3816.49 cw(c4407.61,3757.82) v1@4490.58,3757.82 ; S3.4@4466.28,3816.49 cw(c4407.61,3757.82) v1@4490.58,3757.82 ; S3.4@4466.28,3816.49 cw(c4407.61,3757.82) v1@4490.58,3757.82 ; S3.3@4473.35,3582.44 ccw(c4431.75,3624.04) 4490.58,3624.04 ; S3.3@4473.35,3582.44 ccw(c4431.75,3624.04) 4490.58,3624.04 ; S3.3@4473.35,3582.44 ccw(c4431.75,3624.04) 4490.58,3624.04 ; S3.3@4473.35,3582.44 ccw(c4431.75,3624.04) 4490.58,3624.04 ; S3.3@4473.35,3582.44 ccw(c4431.75,3624.04) 4490.58,3624.04 ; S3.4@4473.35,3823.56 cw(c4431.75,3781.96) 4490.58,3781.96 ; S3.4@4473.35,3823.56 cw(c4431.75,3781.96) 4490.58,3781.96 ; S3.4@4473.35,3823.56 cw(c4431.75,3781.96) 4490.58,3781.96 ; S3.4@4473.35,3823.56 cw(c4431.75,3781.96) 4490.58,3781.96 ; S3.4@4473.35,3823.56 cw(c4431.75,3781.96) 4490.58,3781.96 ; v1@4475.86,3725.86 cw(c4440.31,3690.31) 4490.58,3690.31 ; v1@4475.86,3725.86 cw(c4440.31,3690.31) 4490.58,3690.31 ; v1@4475.86,3725.86 cw(c4440.31,3690.31) 4490.58,3690.31 ; v1@4475.86,3725.86 cw(c4440.31,3690.31) 4490.58,3690.31 ; v1@4475.86,3725.86 cw(c4440.31,3690.31) 4490.58,3690.31 ; v1@4475.86,3754.14 ccw(c4440.31,3789.69) 4490.58,3789.69 ; v1@4475.86,3754.14 ccw(c4440.31,3789.69) 4490.58,3789.69 ; v1@4475.86,3754.14 ccw(c4440.31,3789.69) 4490.58,3789.69 ; v1@4475.86,3754.14 ccw(c4440.31,3789.69) 4490.58,3789.69 ; v1@4475.86,3754.14 ccw(c4440.31,3789.69) 4490.58,3789.69 ; v1@4482.93,3732.93 cw(c4464.45,3714.45) 4490.58,3714.45 ; v1@4482.93,3732.93 cw(c4464.45,3714.45) 4490.58,3714.45 ; v1@4482.93,3732.93 cw(c4464.45,3714.45) 4490.58,3714.45 ; v1@4482.93,3732.93 cw(c4464.45,3714.45) 4490.58,3714.45 ; v1@4482.93,3732.93 cw(c4464.45,3714.45) 4490.58,3714.45 ; v1@4482.93,3747.07 ccw(c4464.45,3765.55) 4490.58,3765.55 ; v1@4482.93,3747.07 ccw(c4464.45,3765.55) 4490.58,3765.55 ; v1@4482.93,3747.07 ccw(c4464.45,3765.55) 4490.58,3765.55 ; v1@4482.93,3747.07 ccw(c4464.45,3765.55) 4490.58,3765.55 ; v1@4482.93,3747.07 ccw(c4464.45,3765.55) 4490.58,3765.55 ; S3.4@4484.95,3840.8 cw(c4550.52,3840.8) 4504.16,3887.16 ; S3.4@4484.95,3840.8 cw(c4550.52,3840.8) 4504.16,3887.16 ; S3.4@4484.95,3840.8 cw(c4550.52,3840.8) 4504.16,3887.16 ; S3.4@4484.95,3840.8 cw(c4550.52,3840.8) 4504.16,3887.16 ; S3.4@4484.95,3840.8 cw(c4550.52,3840.8) 4504.16,3887.16 ; 4490.58,3624.04 ccw(c4549.42,3624.04) S3.3@4507.81,3582.44 ; 4490.58,3624.04 ccw(c4549.42,3624.04) S3.3@4507.81,3582.44 ; 4490.58,3624.04 ccw(c4549.42,3624.04) S3.3@4507.81,3582.44 ; 4490.58,3624.04 ccw(c4549.42,3624.04) S3.3@4507.81,3582.44 ; 4490.58,3624.04 ccw(c4549.42,3624.04) S3.3@4507.81,3582.44 ; 4490.58,3648.18 ccw(c4573.56,3648.18) S3.3@4514.89,3589.51 ; 4490.58,3648.18 ccw(c4573.56,3648.18) S3.3@4514.89,3589.51 ; 4490.58,3648.18 ccw(c4573.56,3648.18) S3.3@4514.89,3589.51 ; 4490.58,3648.18 ccw(c4573.56,3648.18) S3.3@4514.89,3589.51 ; 4490.58,3648.18 ccw(c4573.56,3648.18) S3.3@4514.89,3589.51 ; 4490.58,3693.12 cw(c4536.88,3693.12) v1@4504.14,3725.86 ; 4490.58,3693.12 cw(c4536.88,3693.12) v1@4504.14,3725.86 ; 4490.58,3693.12 cw(c4536.88,3693.12) v1@4504.14,3725.86 ; 4490.58,3693.12 cw(c4536.88,3693.12) v1@4504.14,3725.86 ; 4490.58,3693.12 cw(c4536.88,3693.12) v1@4504.14,3725.86 ; v1@4490.58,3757.82 cw(c4573.56,3757.82) S3.4@4514.89,3816.49 ; v1@4490.58,3757.82 cw(c4573.56,3757.82) S3.4@4514.89,3816.49 ; v1@4490.58,3757.82 cw(c4573.56,3757.82) S3.4@4514.89,3816.49 ; v1@4490.58,3757.82 cw(c4573.56,3757.82) S3.4@4514.89,3816.49 ; v1@4490.58,3757.82 cw(c4573.56,3757.82) S3.4@4514.89,3816.49 ; 4490.58,3781.96 cw(c4549.42,3781.96) S3.4@4507.81,3823.56 ; 4490.58,3781.96 cw(c4549.42,3781.96) S3.4@4507.81,3823.56 ; 4490.58,3781.96 cw(c4549.42,3781.96) S3.4@4507.81,3823.56 ; 4490.58,3781.96 cw(c4549.42,3781.96) S3.4@4507.81,3823.56 ; 4490.58,3781.96 cw(c4549.42,3781.96) S3.4@4507.81,3823.56 ; 4490.58,3786.88 ccw(c4536.88,3786.88) v1@4504.14,3754.14 ; 4490.58,3786.88 ccw(c4536.88,3786.88) v1@4504.14,3754.14 ; 4490.58,3786.88 ccw(c4536.88,3786.88) v1@4504.14,3754.14 ; 4490.58,3786.88 ccw(c4536.88,3786.88) v1@4504.14,3754.14 ; 4490.58,3786.88 ccw(c4536.88,3786.88) v1@4504.14,3754.14 ; S3.4@4494.95,3840.8 cw(c4584.66,3840.8) 4521.23,3904.23 ; S3.4@4494.95,3840.8 cw(c4584.66,3840.8) 4521.23,3904.23 ; S3.4@4494.95,3840.8 cw(c4584.66,3840.8) 4521.23,3904.23 ; S3.4@4494.95,3840.8 cw(c4584.66,3840.8) 4521.23,3904.23 ; S3.4@4494.95,3840.8 cw(c4584.66,3840.8) 4521.23,3904.23 ; S3.4@4504.95,3840.8 cw(c4618.8,3840.8) 4538.3,3921.3 ; S3.4@4504.95,3840.8 cw(c4618.8,3840.8) 4538.3,3921.3 ; S3.4@4504.95,3840.8 cw(c4618.8,3840.8) 4538.3,3921.3 ; S3.4@4504.95,3840.8 cw(c4618.8,3840.8) 4538.3,3921.3 ; S3.4@4504.95,3840.8 cw(c4618.8,3840.8) 4538.3,3921.3 ; S3.4@4514.95,3840.8 cw(c4652.94,3840.8) 4555.37,3938.37 ; S3.4@4514.95,3840.8 cw(c4652.94,3840.8) 4555.37,3938.37 ; S3.4@4514.95,3840.8 cw(c4652.94,3840.8) 4555.37,3938.37 ; S3.4@4514.95,3840.8 cw(c4652.94,3840.8) 4555.37,3938.37 ; S3.4@4514.95,3840.8 cw(c4652.94,3840.8) 4555.37,3938.37 ; S3.4@4524.95,3840.8 cw(c4687.09,3840.8) 4572.44,3955.44 ; S3.4@4524.95,3840.8 cw(c4687.09,3840.8) 4572.44,3955.44 ; S3.4@4524.95,3840.8 cw(c4687.09,3840.8) 4572.44,3955.44 ; S3.4@4524.95,3840.8 cw(c4687.09,3840.8) 4572.44,3955.44 ; S3.4@4524.95,3840.8 cw(c4687.09,3840.8) 4572.44,3955.44 ; 4619.41,4002.41 cw(c4668,3953.82) P1.20@4668,4022.54 ; 4619.41,4002.41 ccw(c4570.82,4051) P1.20@4639.54,4051 ; 4619.41,4002.41 cw(c4668,3953.82) P1.20@4668,4022.54 ; 4619.41,4002.41 ccw(c4570.82,4051) P1.20@4639.54,4051 ; 4619.41,4002.41 ccw(c4570.82,4051) P1.20@4639.54,4051 ; 4619.41,4002.41 cw(c4668,3953.82) P1.20@4668,4022.54 ; 4619.41,4002.41 ccw(c4570.82,4051) P1.20@4639.54,4051 ; 4619.41,4002.41 cw(c4668,3953.82) P1.20@4668,4022.54 ; 4619.41,4002.41 ccw(c4570.82,4051) P1.20@4639.54,4051 ; 4619.41,4002.41 cw(c4668,3953.82) P1.20@4668,4022.54 ; 4636.48,4019.48 cw(c4668,3987.96) P1.20@4668,4032.54 ; 4636.48,4019.48 ccw(c4604.96,4051) P1.20@4649.54,4051 ; 4636.48,4019.48 cw(c4668,3987.96) P1.20@4668,4032.54 ; 4636.48,4019.48 ccw(c4604.96,4051) P1.20@4649.54,4051 ; 4636.48,4019.48 ccw(c4604.96,4051) P1.20@4649.54,4051 ; 4636.48,4019.48 cw(c4668,3987.96) P1.20@4668,4032.54 ; 4636.48,4019.48 ccw(c4604.96,4051) P1.20@4649.54,4051 ; 4636.48,4019.48 cw(c4668,3987.96) P1.20@4668,4032.54 ; 4636.48,4019.48 ccw(c4604.96,4051) P1.20@4649.54,4051 ; 4636.48,4019.48 cw(c4668,3987.96) P1.20@4668,4032.54
  Bottom Layer w10: C3.2@4434.46,3677.97 4434.46,3740 v1(4490,3740) ; R3.2@4423.47,3727.04 cw(c4396.94,3700.5) 4434.46,3700.5 ; R3.2@4423.47,3727.04 cw(c4396.94,3700.5) 4434.46,3700.5 ; R3.2@4423.47,3727.04 cw(c4396.94,3700.5) 4434.46,3700.5 ; R3.2@4423.47,3727.04 cw(c4396.94,3700.5) 4434.46,3700.5 ; R3.2@4423.47,3727.04 cw(c4396.94,3700.5) 4434.46,3700.5 ; C3.2@4427.14,3682.6 ccw(c4409.47,3700.27) 4434.46,3700.27 ; C3.2@4427.14,3682.6 ccw(c4409.47,3700.27) 4434.46,3700.27 ; C3.2@4427.14,3682.6 ccw(c4409.47,3700.27) 4434.46,3700.27 ; C3.2@4427.14,3682.6 ccw(c4409.47,3700.27) 4434.46,3700.27 ; C3.2@4427.14,3682.6 ccw(c4409.47,3700.27) 4434.46,3700.27 ; 4434.46,3701.62 ccw(c4461.37,3701.62) C3.2@4442.34,3682.6 ; 4434.46,3701.62 ccw(c4461.37,3701.62) C3.2@4442.34,3682.6 ; 4434.46,3701.62 ccw(c4461.37,3701.62) C3.2@4442.34,3682.6 ; 4434.46,3701.62 ccw(c4461.37,3701.62) C3.2@4442.34,3682.6 ; 4434.46,3701.62 ccw(c4461.37,3701.62) C3.2@4442.34,3682.6 ; 4434.46,3710.16 cw(c4458.34,3710.16) R3.2@4441.46,3727.04 ; 4434.46,3710.16 cw(c4458.34,3710.16) R3.2@4441.46,3727.04 ; 4434.46,3710.16 cw(c4458.34,3710.16) R3.2@4441.46,3727.04 ; 4434.46,3710.16 cw(c4458.34,3710.16) R3.2@4441.46,3727.04 ; 4434.46,3710.16 cw(c4458.34,3710.16) R3.2@4441.46,3727.04 ; R3.2@4441.46,3730.98 cw(c4463.24,3709.19) 4463.24,3740 ; R3.2@4441.46,3730.98 cw(c4463.24,3709.19) 4463.24,3740 ; R3.2@4441.46,3730.98 cw(c4463.24,3709.19) 4463.24,3740 ; R3.2@4441.46,3730.98 cw(c4463.24,3709.19) 4463.24,3740 ; R3.2@4441.46,3730.98 cw(c4463.24,3709.19) 4463.24,3740 ; R3.2@4441.46,3748.96 ccw(c4463.09,3770.59) 4463.09,3740 ; R3.2@4441.46,3748.96 ccw(c4463.09,3770.59) 4463.09,3740 ; R3.2@4441.46,3748.96 ccw(c4463.09,3770.59) 4463.09,3740 ; R3.2@4441.46,3748.96 ccw(c4463.09,3770.59) 4463.09,3740 ; R3.2@4441.46,3748.96 ccw(c4463.09,3770.59) 4463.09,3740 ; R3.2@4441.72,3740 cw(c4441.72,3691.72) v1@4475.86,3725.86 ; R3.2@4441.72,3740 ccw(c4441.72,3788.28) v1@4475.86,3754.14 ; R3.2@4441.72,3740 cw(c4441.72,3691.72) v1@4475.86,3725.86 ; R3.2@4441.72,3740 ccw(c4441.72,3788.28) v1@4475.86,3754.14 ; R3.2@4441.72,3740 ccw(c4441.72,3788.28) v1@4475.86,3754.14 ; R3.2@4441.72,3740 cw(c4441.72,3691.72) v1@4475.86,3725.86 ; R3.2@4441.72,3740 ccw(c4441.72,3788.28) v1@4475.86,3754.14 ; R3.2@4441.72,3740 cw(c4441.72,3691.72) v1@4475.86,3725.86 ; R3.2@4441.72,3740 ccw(c4441.72,3788.28) v1@4475.86,3754.14 ; R3.2@4441.72,3740 cw(c4441.72,3691.72) v1@4475.86,3725.86
TX_485: P1.15 U3.1 | length 1743.7
  Bottom Layer w10: U3.1@5016.19,3435.81 5095.81,3435.81 5168,3508 P1.15@5168,4051 ; U3.1@5052.51,3431 cw(c5064.13,3419.37) 5064.13,3435.81 ; U3.1@5052.51,3431 cw(c5064.13,3419.37) 5064.13,3435.81 ; U3.1@5052.51,3431 cw(c5064.13,3419.37) 5064.13,3435.81 ; U3.1@5052.51,3431 cw(c5064.13,3419.37) 5064.13,3435.81 ; U3.1@5052.51,3431 cw(c5064.13,3419.37) 5064.13,3435.81 ; U3.1@5052.51,3440.63 ccw(c5064.13,3452.26) 5064.13,3435.81 ; U3.1@5052.51,3440.63 ccw(c5064.13,3452.26) 5064.13,3435.81 ; U3.1@5052.51,3440.63 ccw(c5064.13,3452.26) 5064.13,3435.81 ; U3.1@5052.51,3440.63 ccw(c5064.13,3452.26) 5064.13,3435.81 ; U3.1@5052.51,3440.63 ccw(c5064.13,3452.26) 5064.13,3435.81 ; P1.15@5147.87,4030.87 cw(c5099.28,3982.28) 5168,3982.28 ; P1.15@5147.87,4030.87 cw(c5099.28,3982.28) 5168,3982.28 ; P1.15@5147.87,4030.87 cw(c5099.28,3982.28) 5168,3982.28 ; P1.15@5147.87,4030.87 cw(c5099.28,3982.28) 5168,3982.28 ; P1.15@5147.87,4030.87 cw(c5099.28,3982.28) 5168,3982.28 ; P1.15@5154.94,4037.94 cw(c5123.42,4006.42) 5168,4006.42 ; P1.15@5154.94,4037.94 cw(c5123.42,4006.42) 5168,4006.42 ; P1.15@5154.94,4037.94 cw(c5123.42,4006.42) 5168,4006.42 ; P1.15@5154.94,4037.94 cw(c5123.42,4006.42) 5168,4006.42 ; P1.15@5154.94,4037.94 cw(c5123.42,4006.42) 5168,4006.42 ; 5168,3982.28 cw(c5236.72,3982.28) P1.15@5188.13,4030.87 ; 5168,3982.28 cw(c5236.72,3982.28) P1.15@5188.13,4030.87 ; 5168,3982.28 cw(c5236.72,3982.28) P1.15@5188.13,4030.87 ; 5168,3982.28 cw(c5236.72,3982.28) P1.15@5188.13,4030.87 ; 5168,3982.28 cw(c5236.72,3982.28) P1.15@5188.13,4030.87 ; 5168,4006.42 cw(c5212.58,4006.42) P1.15@5181.06,4037.94 ; 5168,4006.42 cw(c5212.58,4006.42) P1.15@5181.06,4037.94 ; 5168,4006.42 cw(c5212.58,4006.42) P1.15@5181.06,4037.94 ; 5168,4006.42 cw(c5212.58,4006.42) P1.15@5181.06,4037.94 ; 5168,4006.42 cw(c5212.58,4006.42) P1.15@5181.06,4037.94
YELLOW1: P1.31 R9.2 | length 2617.2
  Bottom Layer w10: P1.31@3508,4051 3508,3552 3605,3455 3790,3455 3830.9,3414.1 R9.2@3830.9,3380 ; P1.31@3487.87,4030.87 cw(c3439.28,3982.28) 3508,3982.28 ; P1.31@3487.87,4030.87 cw(c3439.28,3982.28) 3508,3982.28 ; P1.31@3487.87,4030.87 cw(c3439.28,3982.28) 3508,3982.28 ; P1.31@3487.87,4030.87 cw(c3439.28,3982.28) 3508,3982.28 ; P1.31@3487.87,4030.87 cw(c3439.28,3982.28) 3508,3982.28 ; P1.31@3494.94,4037.94 cw(c3463.42,4006.42) 3508,4006.42 ; P1.31@3494.94,4037.94 cw(c3463.42,4006.42) 3508,4006.42 ; P1.31@3494.94,4037.94 cw(c3463.42,4006.42) 3508,4006.42 ; P1.31@3494.94,4037.94 cw(c3463.42,4006.42) 3508,4006.42 ; P1.31@3494.94,4037.94 cw(c3463.42,4006.42) 3508,4006.42 ; 3508,3982.28 cw(c3576.72,3982.28) P1.31@3528.13,4030.87 ; 3508,3982.28 cw(c3576.72,3982.28) P1.31@3528.13,4030.87 ; 3508,3982.28 cw(c3576.72,3982.28) P1.31@3528.13,4030.87 ; 3508,3982.28 cw(c3576.72,3982.28) P1.31@3528.13,4030.87 ; 3508,3982.28 cw(c3576.72,3982.28) P1.31@3528.13,4030.87 ; 3508,4006.42 cw(c3552.58,4006.42) P1.31@3521.06,4037.94 ; 3508,4006.42 cw(c3552.58,4006.42) P1.31@3521.06,4037.94 ; 3508,4006.42 cw(c3552.58,4006.42) P1.31@3521.06,4037.94 ; 3508,4006.42 cw(c3552.58,4006.42) P1.31@3521.06,4037.94 ; 3508,4006.42 cw(c3552.58,4006.42) P1.31@3521.06,4037.94 ; 3798.46,3446.54 cw(c3735.05,3383.13) R9.2@3824.69,3380.67 ; 3798.46,3446.54 cw(c3735.05,3383.13) R9.2@3824.69,3380.67 ; 3798.46,3446.54 cw(c3735.05,3383.13) R9.2@3824.69,3380.67 ; 3798.46,3446.54 cw(c3735.05,3383.13) R9.2@3824.69,3380.67 ; 3798.46,3446.54 cw(c3735.05,3383.13) R9.2@3824.69,3380.67 ; 3814.89,3430.11 cw(c3767.03,3382.25) R9.2@3834.69,3380.39 ; 3814.89,3430.11 cw(c3767.03,3382.25) R9.2@3834.69,3380.39 ; 3814.89,3430.11 cw(c3767.03,3382.25) R9.2@3834.69,3380.39 ; 3814.89,3430.11 cw(c3767.03,3382.25) R9.2@3834.69,3380.39 ; 3814.89,3430.11 cw(c3767.03,3382.25) R9.2@3834.69,3380.39 ; 3817.6,3427.4 ccw(c3849.06,3458.85) R9.2@3849.06,3414.37 ; 3817.6,3427.4 ccw(c3849.06,3458.85) R9.2@3849.06,3414.37 ; 3817.6,3427.4 ccw(c3849.06,3458.85) R9.2@3849.06,3414.37 ; 3817.6,3427.4 ccw(c3849.06,3458.85) R9.2@3849.06,3414.37 ; 3817.6,3427.4 ccw(c3849.06,3458.85) R9.2@3849.06,3414.37
YELLOW2: P1.26 R15.2 | length 3581.1
  Bottom Layer w10: R15.2@3849.06,3020 3849.06,3049.06 3905,3105 ; P1.26@4008,4051 4008,3972 4175,3805 4175,3170 4110,3105 3905,3105 ; R15.2@3853.32,3020.96 cw(c3901.23,3031.77) 3866.5,3066.5 ; R15.2@3853.32,3020.96 cw(c3901.23,3031.77) 3866.5,3066.5 ; R15.2@3853.32,3020.96 cw(c3901.23,3031.77) 3866.5,3066.5 ; R15.2@3853.32,3020.96 cw(c3901.23,3031.77) 3866.5,3066.5 ; R15.2@3853.32,3020.96 cw(c3901.23,3031.77) 3866.5,3066.5 ; R15.2@3863.07,3023.16 cw(c3922.17,3036.49) 3879.33,3079.33 ; R15.2@3863.07,3023.16 cw(c3922.17,3036.49) 3879.33,3079.33 ; R15.2@3863.07,3023.16 cw(c3922.17,3036.49) 3879.33,3079.33 ; R15.2@3863.07,3023.16 cw(c3922.17,3036.49) 3879.33,3079.33 ; R15.2@3863.07,3023.16 cw(c3922.17,3036.49) 3879.33,3079.33 ; R15.2@3872.83,3025.36 cw(c3943.11,3041.22) 3892.16,3092.16 ; R15.2@3872.83,3025.36 cw(c3943.11,3041.22) 3892.16,3092.16 ; R15.2@3872.83,3025.36 cw(c3943.11,3041.22) 3892.16,3092.16 ; R15.2@3872.83,3025.36 cw(c3943.11,3041.22) 3892.16,3092.16 ; R15.2@3872.83,3025.36 cw(c3943.11,3041.22) 3892.16,3092.16 ; R15.2@3882.58,3027.56 cw(c3964.05,3045.94) 3905,3105 ; R15.2@3882.58,3027.56 cw(c3964.05,3045.94) 3905,3105 ; R15.2@3882.58,3027.56 cw(c3964.05,3045.94) 3905,3105 ; R15.2@3882.58,3027.56 cw(c3964.05,3045.94) 3905,3105 ; R15.2@3882.58,3027.56 cw(c3964.05,3045.94) 3905,3105 ; P1.26@3987.87,4030.87 cw(c3939.28,3982.28) 4008,3982.28 ; P1.26@3987.87,4030.87 cw(c3939.28,3982.28) 4008,3982.28 ; P1.26@3987.87,4030.87 cw(c3939.28,3982.28) 4008,3982.28 ; P1.26@3987.87,4030.87 cw(c3939.28,3982.28) 4008,3982.28 ; P1.26@3987.87,4030.87 cw(c3939.28,3982.28) 4008,3982.28 ; P1.26@3994.94,4037.94 cw(c3963.42,4006.42) 4008,4006.42 ; P1.26@3994.94,4037.94 cw(c3963.42,4006.42) 4008,4006.42 ; P1.26@3994.94,4037.94 cw(c3963.42,4006.42) 4008,4006.42 ; P1.26@3994.94,4037.94 cw(c3963.42,4006.42) 4008,4006.42 ; P1.26@3994.94,4037.94 cw(c3963.42,4006.42) 4008,4006.42 ; 4008,3982.28 cw(c4076.72,3982.28) P1.26@4028.13,4030.87 ; 4008,3982.28 cw(c4076.72,3982.28) P1.26@4028.13,4030.87 ; 4008,3982.28 cw(c4076.72,3982.28) P1.26@4028.13,4030.87 ; 4008,3982.28 cw(c4076.72,3982.28) P1.26@4028.13,4030.87 ; 4008,3982.28 cw(c4076.72,3982.28) P1.26@4028.13,4030.87 ; 4008,4006.42 cw(c4052.58,4006.42) P1.26@4021.06,4037.94 ; 4008,4006.42 cw(c4052.58,4006.42) P1.26@4021.06,4037.94 ; 4008,4006.42 cw(c4052.58,4006.42) P1.26@4021.06,4037.94 ; 4008,4006.42 cw(c4052.58,4006.42) P1.26@4021.06,4037.94 ; 4008,4006.42 cw(c4052.58,4006.42) P1.26@4021.06,4037.94
YELLOW3: P2.2 R19.2 | length 2903.9
  Bottom Layer w10: P2.2@3440,2280 3555,2395 3855,2395 3910,2450 3910,2585 3849.06,2645.94 R19.2@3849.06,2660 ; P2.2@3440,2304.37 ccw(c3440,2363.2) 3481.6,2321.6 ; P2.2@3440,2304.37 ccw(c3440,2363.2) 3481.6,2321.6 ; P2.2@3440,2304.37 ccw(c3440,2363.2) 3481.6,2321.6 ; P2.2@3440,2304.37 ccw(c3440,2363.2) 3481.6,2321.6 ; P2.2@3440,2304.37 ccw(c3440,2363.2) 3481.6,2321.6 ; P2.2@3440,2314.37 ccw(c3440,2397.35) 3498.67,2338.67 ; P2.2@3440,2314.37 ccw(c3440,2397.35) 3498.67,2338.67 ; P2.2@3440,2314.37 ccw(c3440,2397.35) 3498.67,2338.67 ; P2.2@3440,2314.37 ccw(c3440,2397.35) 3498.67,2338.67 ; P2.2@3440,2314.37 ccw(c3440,2397.35) 3498.67,2338.67 ; P2.2@3464.37,2280 cw(c3523.2,2280) 3481.6,2321.6 ; P2.2@3464.37,2280 cw(c3523.2,2280) 3481.6,2321.6 ; P2.2@3464.37,2280 cw(c3523.2,2280) 3481.6,2321.6 ; P2.2@3464.37,2280 cw(c3523.2,2280) 3481.6,2321.6 ; P2.2@3464.37,2280 cw(c3523.2,2280) 3481.6,2321.6 ; P2.2@3474.37,2280 cw(c3557.35,2280) 3498.67,2338.67 ; P2.2@3474.37,2280 cw(c3557.35,2280) 3498.67,2338.67 ; P2.2@3474.37,2280 cw(c3557.35,2280) 3498.67,2338.67 ; P2.2@3474.37,2280 cw(c3557.35,2280) 3498.67,2338.67 ; P2.2@3474.37,2280 cw(c3557.35,2280) 3498.67,2338.67 ; R19.2@3849.06,2625.63 cw(c3849.06,2576.59) 3883.73,2611.27 ; R19.2@3849.06,2625.63 cw(c3849.06,2576.59) 3883.73,2611.27 ; R19.2@3849.06,2625.63 cw(c3849.06,2576.59) 3883.73,2611.27 ; R19.2@3849.06,2625.63 cw(c3849.06,2576.59) 3883.73,2611.27 ; R19.2@3849.06,2625.63 cw(c3849.06,2576.59) 3883.73,2611.27 ; R19.2@3863.23,2657.65 ccw(c3906.41,2650.49) 3875.46,2619.54 ; R19.2@3863.23,2657.65 ccw(c3906.41,2650.49) 3875.46,2619.54 ; R19.2@3863.23,2657.65 ccw(c3906.41,2650.49) 3875.46,2619.54 ; R19.2@3863.23,2657.65 ccw(c3906.41,2650.49) 3875.46,2619.54 ; R19.2@3863.23,2657.65 ccw(c3906.41,2650.49) 3875.46,2619.54 ; R19.2@3873.1,2656.01 ccw(c3930.01,2646.58) 3889.22,2605.78 ; R19.2@3873.1,2656.01 ccw(c3930.01,2646.58) 3889.22,2605.78 ; R19.2@3873.1,2656.01 ccw(c3930.01,2646.58) 3889.22,2605.78 ; R19.2@3873.1,2656.01 ccw(c3930.01,2646.58) 3889.22,2605.78 ; R19.2@3873.1,2656.01 ccw(c3930.01,2646.58) 3889.22,2605.78 ; R19.2@3882.96,2654.38 ccw(c3953.6,2642.66) 3902.97,2592.03 ; R19.2@3882.96,2654.38 ccw(c3953.6,2642.66) 3902.97,2592.03 ; R19.2@3882.96,2654.38 ccw(c3953.6,2642.66) 3902.97,2592.03 ; R19.2@3882.96,2654.38 ccw(c3953.6,2642.66) 3902.97,2592.03 ; R19.2@3882.96,2654.38 ccw(c3953.6,2642.66) 3902.97,2592.03
pads on no net: P1.0 P1.1 P1.2 P1.3 P1.8 P1.11 P1.12 P1.13 P1.14 P1.30

## Polygon pours and split planes (outlines as drawn)
GND on Top Layer "Bottom Layer-No Net" (solid, remove dead copper): 3122,2051 3123,2052 3123,4151 5379,4151 5380,4150 5370,4140 5370,2050
GND on Bottom Layer "Bottom Layer-No Net" (solid, remove dead copper): 3122,2060 3122,4139 3123,4140 3128,4145 5380,4145 5380,2050

## Keep-outs
Keep-Out Layer:
  lines w5: 3122,2051 3122,2387
  lines w10: 3122,2051 5268,2051 5268,2101 5368,2201 5368,3551 5268,3651 5268,4051 5168,4151 3123,4151 3123,3804 3434,3804 3434,2387 3122,2387 3122,2051

## Other copper
Bottom Layer:
  rectangle net DIR_485: 4980,3335 5050,3385

## Silkscreen, mask and mechanical layers (free items; w line width, h text height)
Top Solder:
  text "SW 3" at 4350,3440 h30
  text "SW 2" at 4670,3440 h30
  text "SW 1" at 5000,3440 h30
  text "Software for Embedded Systems" at 4215,3310 h40
  text "Project 2017" at 4215,3210 h40
  text "ICTES 9" at 4220,3110 h40
  text "LED SET 1" at 3630,3095 h35
  text "LED SET 2" at 3625,2740 h35
  text "ADJ 1" at 4290,2550 h30
  text "LED SET 3" at 3625,2370 h35
  text "ADJ 2" at 4910,2245 h30
  text "RS485" at 5185,2245 h30
  text "R3" at 3360,2110 h35 r90
  text "Y3" at 3455,2110 h35 r90
  text "G3" at 3555,2110 h35 r90
  text "BUZZ" at 3660,2085 h30 r90

## Text inside footprints (layer, text, board x,y; h text height)
P1: Top Overlay "AREF" at 3608,3953.93 h20 r225; Top Overlay "GND" at 3708,3953.93 h20 r225; Top Overlay "D13" at 3808,3953.93 h20 r225; Top Overlay "D12" at 3908,3953.93 h20 r225; Top Overlay "D11" at 4008,3953.93 h20 r225; Top Overlay "D10" at 4108,3961 h20 r225; Top Overlay "D9" at 4208,3961 h20 r225; Top Overlay "D8" at 4308,3961 h20 r225; Top Overlay "D7" at 4473,3963.93 h20 r225; Top Overlay "D6" at 4573,3963.93 h20 r225; Top Overlay "D5" at 4673,3963.93 h20 r225; Top Overlay "D4" at 4773,3963.93 h20 r225; Top Overlay "D3" at 4873,3963.93 h20 r225; Top Overlay "D2" at 4973,3963.93 h20 r225; Top Overlay "TX/D1" at 5073,3963.93 h20 r225; Top Overlay "RX/D0" at 5173,3963.93 h20 r225; Top Overlay "A5" at 5168,2238.07 h20 r45; Top Overlay "A4" at 5068,2238.07 h20 r45; Top Overlay "A3" at 4968,2238.07 h20 r45; Top Overlay "A2" at 4868,2238.07 h20 r45; Top Overlay "A1" at 4768,2238.07 h20 r45; Top Overlay "A0" at 4668,2238.07 h20 r45; Top Overlay "Vin" at 4468,2238.07 h20 r45; Top Overlay "GND" at 4368,2238.07 h20 r45; Top Overlay "GND" at 4268,2238.07 h20 r45; Top Overlay "5v" at 4168,2238.07 h20 r45; Top Overlay "3v3" at 4068,2238.07 h20 r45; Top Overlay "RESET" at 3968,2238.07 h20 r45; Top Overlay "IOREF" at 3863,2238.07 h20 r45; Top Overlay "D14" at 3508,3958.93 h20 r225; Top Overlay "D15" at 3408,3953.93 h20 r225